# EAGLE board OR_Gate (EAGLE 9.2.2)
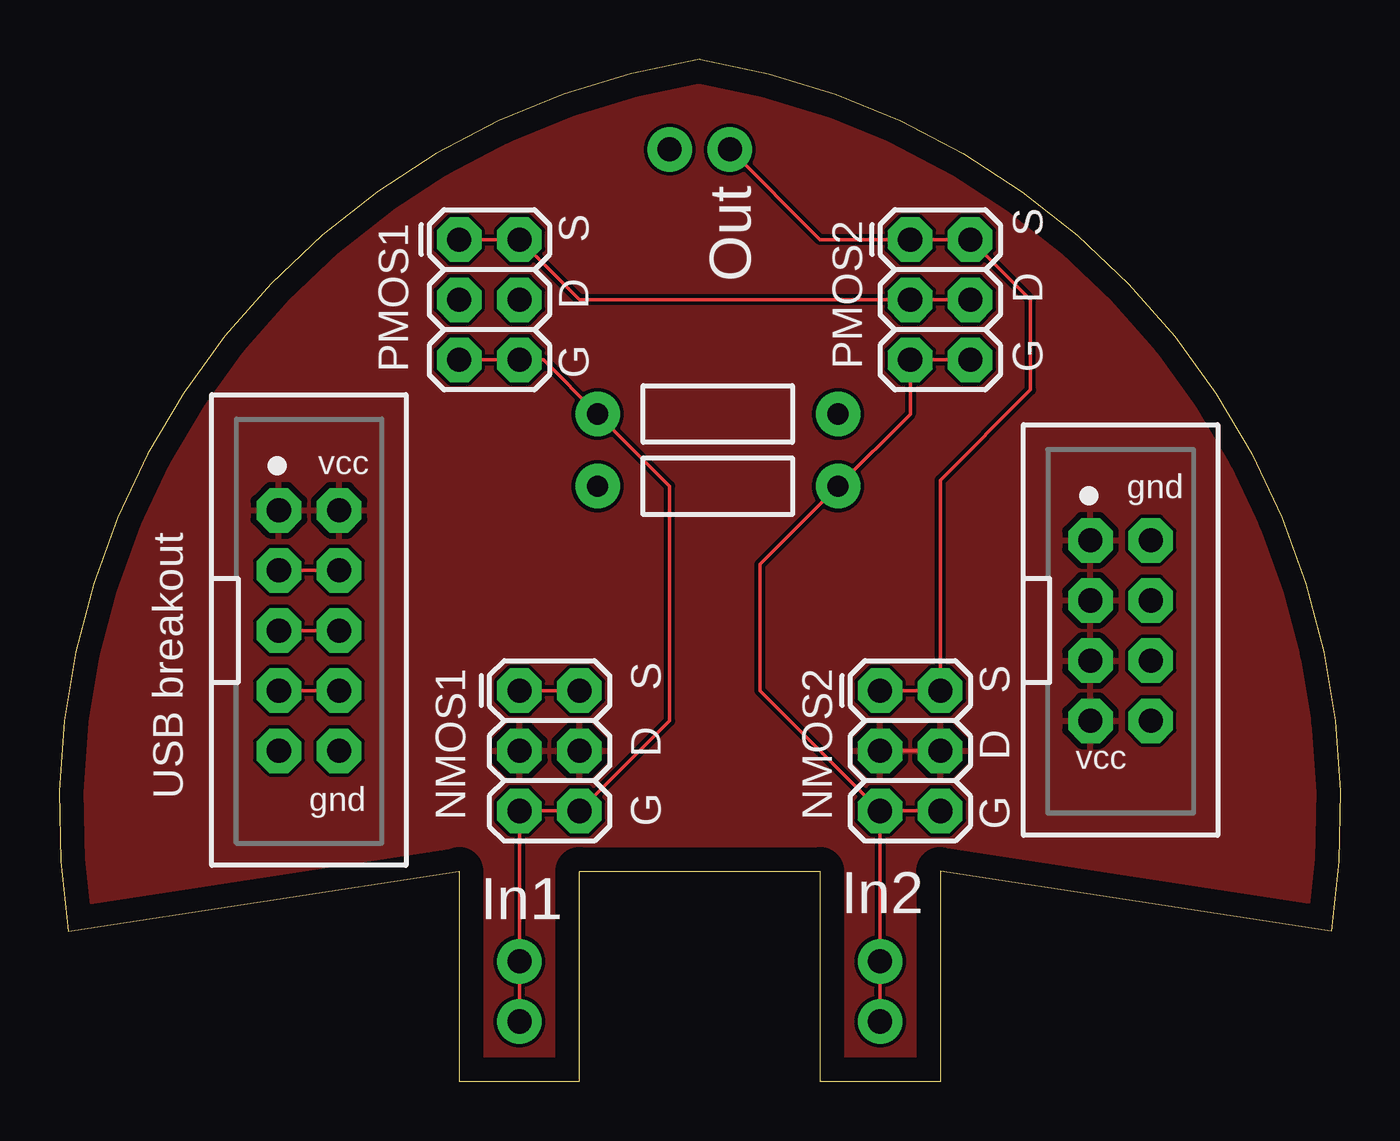
[diagram p0: board, top side]
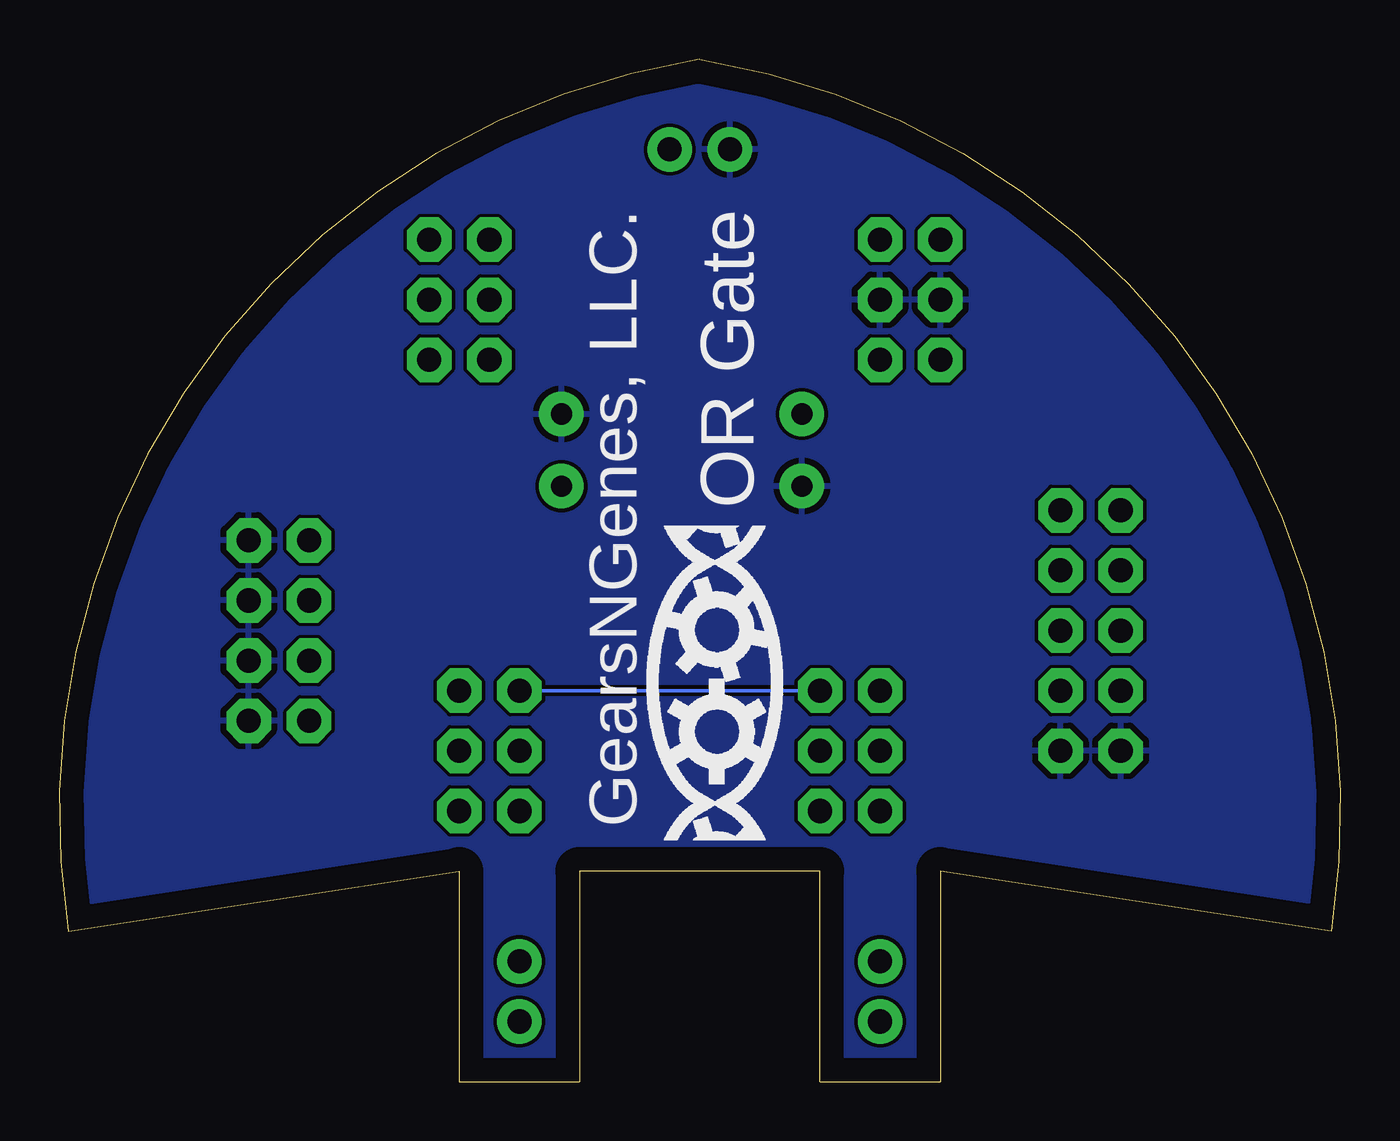
[diagram p1: board, bottom side, seen from below]

Size 54.13 x 43.18 mm. Coordinates in mm from the lower left corner, seen from the top.
Outline: 27.06,43.18 arc-90 53.73,6.35 37.22,8.89 37.22,0 32.14,0 32.14,8.89 21.98,8.89 21.98,0 16.9,0 16.9,8.89 0.39,6.35 arc-90 27.06,43.18
Copper layers (1*16): Top 0.035mm / dielectric 1.5mm / Bottom 0.035mm
Design rules "default": minimum track width 6mil, minimum drill 0.35mm, track to track 6mil, track to pad 6mil, pad to pad 6mil, via to via 6mil, smd to smd 6mil, copper to edge 40mil, drill to drill 6mil, minimum pad ring 10mil, minimum via ring 8mil, stop-mask expansion 4mil, vias tented up to drill 0mil, thermal gap 10mil

## Footprints (pad centres in the part's own frame; a part is rotated, then mirrored left to right if it is on the bottom)
2X5-SHROUDED = drill 1.016 pad 1.88 octagon: 1 -5.08,-1.27; 2 -5.08,1.27; 3 -2.54,-1.27; 4 -2.54,1.27; 5 0,-1.27; 6 0,1.27; 7 2.54,-1.27; 8 2.54,1.27; 9 5.08,-1.27; 10 5.08,1.27
1X02_NO_SILK = drill 1.016 pad 1.88: 1 0,0; 2 2.54,0
2X4-SHROUDED = drill 1.016 pad 1.88 octagon: 1 -3.81,-1.27; 2 -3.81,1.27; 3 -1.27,-1.27; 4 -1.27,1.27; 5 1.27,-1.27; 6 1.27,1.27; 7 3.81,-1.27; 8 3.81,1.27
2X3 = drill 1.016 pad 1.88 octagon: 1 0,0; 2 0,2.54; 3 2.54,0; 4 2.54,2.54; 5 5.08,0; 6 5.08,2.54
AXIAL-0.4 = drill 0.9 pad 1.88: P$1 -5.08,0; P$2 5.08,0

## Placement (x,y rotation side)
J1  [2X5-SHROUDED]  10.55,19.05 270 top
J2  [1X02_NO_SILK]  25.79,39.37 0 top
J3  [1X02_NO_SILK]  34.68,5.08 270 top
J4  [1X02_NO_SILK]  19.44,5.08 270 top
J5  [2X4-SHROUDED]  44.84,19.05 270 top
JP1  N_MOS1  [2X3]  19.44,16.51 270 top
JP2  N_MOS2  [2X3]  34.68,16.51 270 top
JP3  P_MOS1  [2X3]  16.9,35.56 270 top
JP4  P_MOS2  [2X3]  35.95,35.56 270 top
R1  [AXIAL-0.4]  27.82,28.19 180 top
R2  [AXIAL-0.4]  27.82,25.15 0 top

## Library data of the parts
J1-J5 R1 R2 = MG-Eagle_v1
JP1-JP4 = MG-Eagle_v1; PROD_ID: CONN-11566

## Nets
DRAIN2: JP3.1 JP3.2 JP4.3 JP4.4
GND: J1.9 J1.10 J2.1 J5.2 J5.4 J5.6 J5.8 JP3.3 JP3.4 R1.P$1 R2.P$1
N$1: J1.7 J1.8
N$2: J1.5 J1.6
N$3: J1.3 J1.4
N$8: J3.1 J3.2 JP2.5 JP2.6 JP4.5 JP4.6 R2.P$2
N$13: J4.1 J4.2 JP1.5 JP1.6 JP3.5 JP3.6 R1.P$2
SOURCE: J2.2 JP1.1 JP1.2 JP2.1 JP2.2 JP4.1 JP4.2
VCC: J1.1 J1.2 J5.1 J5.3 J5.5 J5.7 JP1.3 JP1.4 JP2.3 JP2.4

## Tracks (layer width: path | path; a pad name or v marks a point on that pad's centre or on a via)
DRAIN2
  Top 0.152: JP3.1 JP3.2 21.98,33.02 JP4.3 JP4.4
GND
  pour Bottom: -3.16,97.54 151.78,97.54 153.05,96.27 153.05,-4.24 -7,-4.24 -7,93.7
N$1
  Top 0.152: J1.8 J1.7
N$2
  Top 0.152: J1.5 J1.6
N$3
  Top 0.152: J1.4 J1.3
N$8
  Top 0.152: J3.2 J3.1 JP2.5 | JP2.5 JP2.6 | JP2.5 29.6,16.51 29.6,21.84 R2.P$2 35.95,28.19 JP4.5 JP4.6
N$13
  Top 0.152: J4.2 J4.1 JP1.5 JP1.6 25.79,15.24 25.79,25.15 R1.P$2 20.46,30.48 JP3.6 JP3.5
SOURCE
  Top 0.152: JP2.1 JP2.2 37.22,25.4 41.03,29.21 41.03,33.02 JP4.2 JP4.1 32.14,35.56 J2.2 | JP1.2 JP1.1
  Bottom 0.152: JP1.2 JP2.1
VCC
  Top 0.152: JP2.3 JP2.4
  pour Top: -6.97,97.54 153.05,97.54 153.05,-4.14 -6.97,-4.14

## Text on the board
tPlace: Out | PMOS2 | PMOS1 | G D S | G D S | vcc | gnd | vcc | USB breakout | gnd | NMOS1 | NMOS2 | G D S | G D S | In2 | In1
bPlace: OR Gate | GearsNGenes, LLC.